# Altium PCB 2016-02-21_13-02-39.PcbDoc
Units mil, origin at the board's own origin, x right, y up, seen from the top; angles counter-clockwise.
Board outline 3075 x 1501 mil, 4 copper layers (Top Layer, MidLayer1, MidLayer2, Bottom Layer); 20 components, 10 nets, 49 pads, 143 vias.
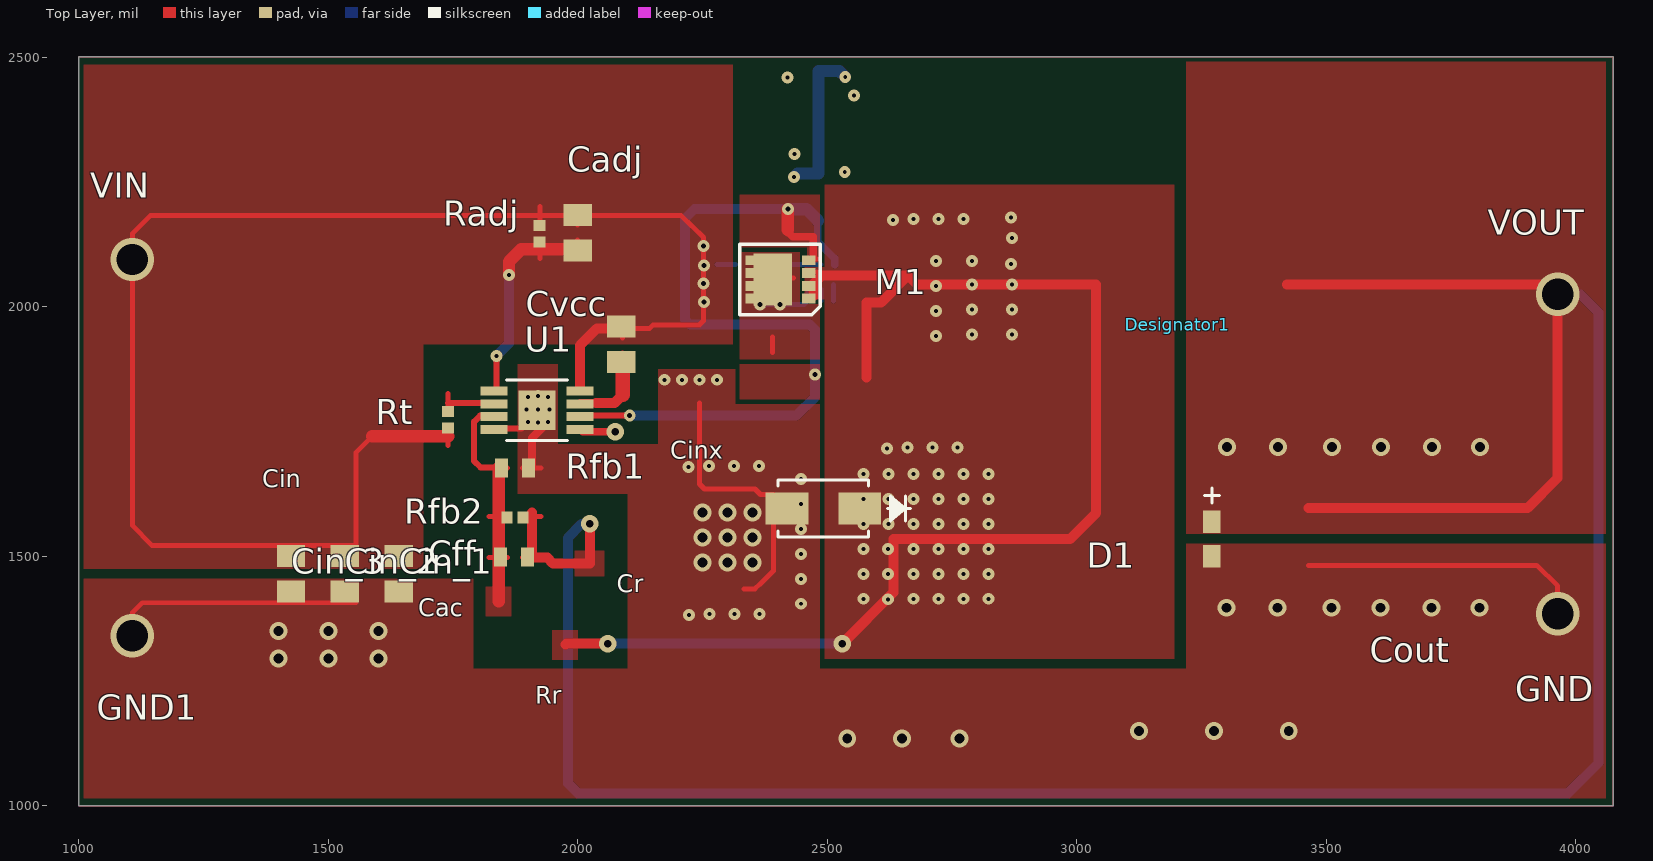
[diagram p0: Top Layer view]
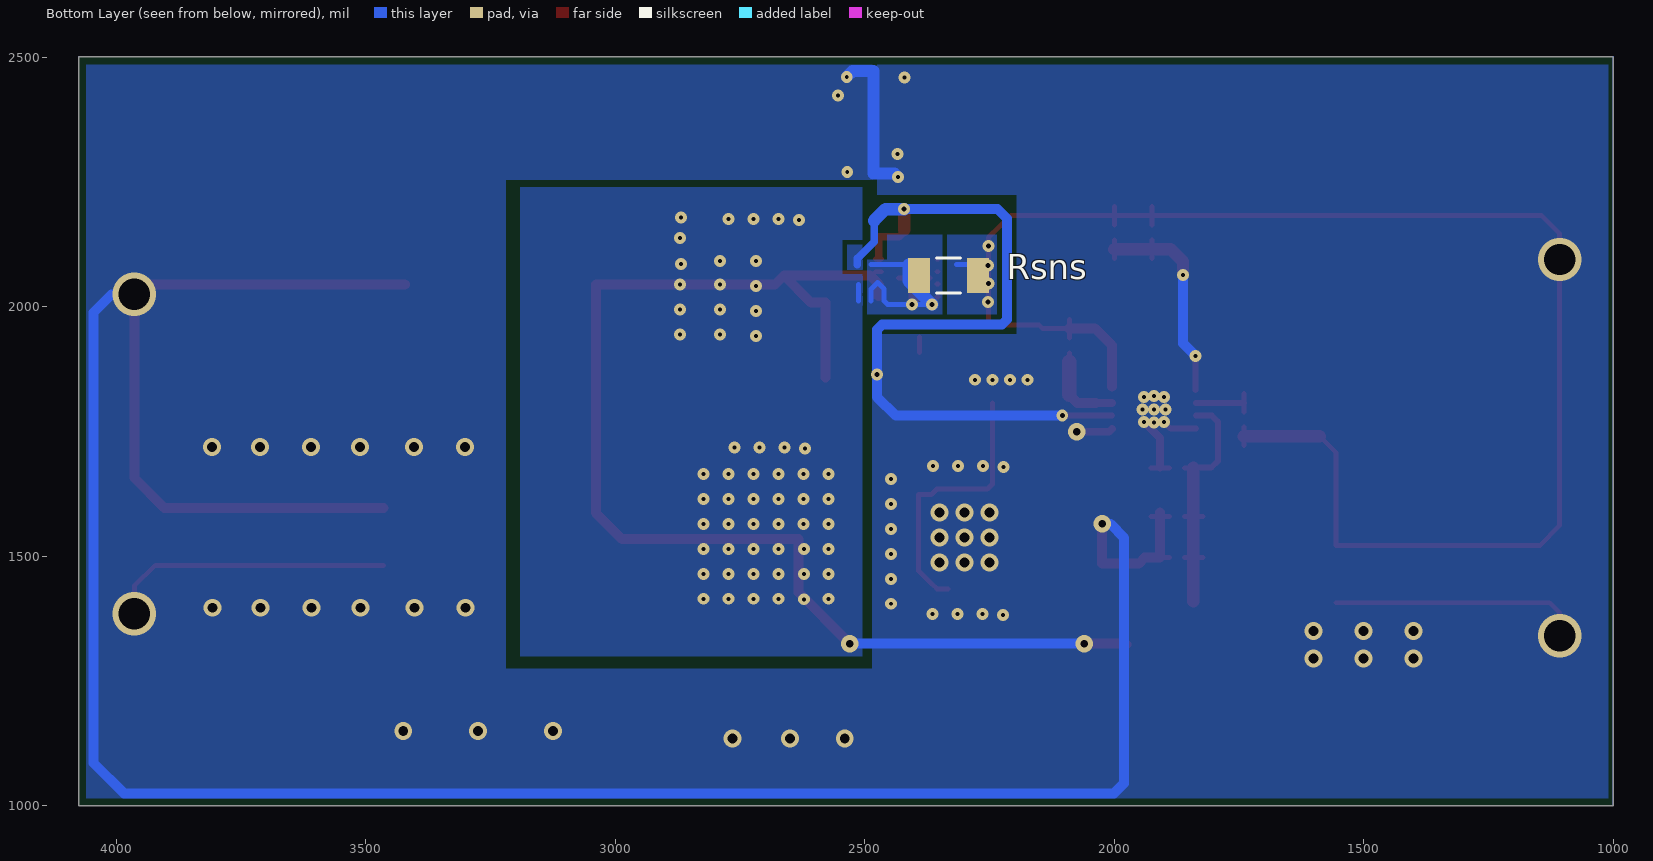
[diagram p1: Bottom Layer view, seen from below]
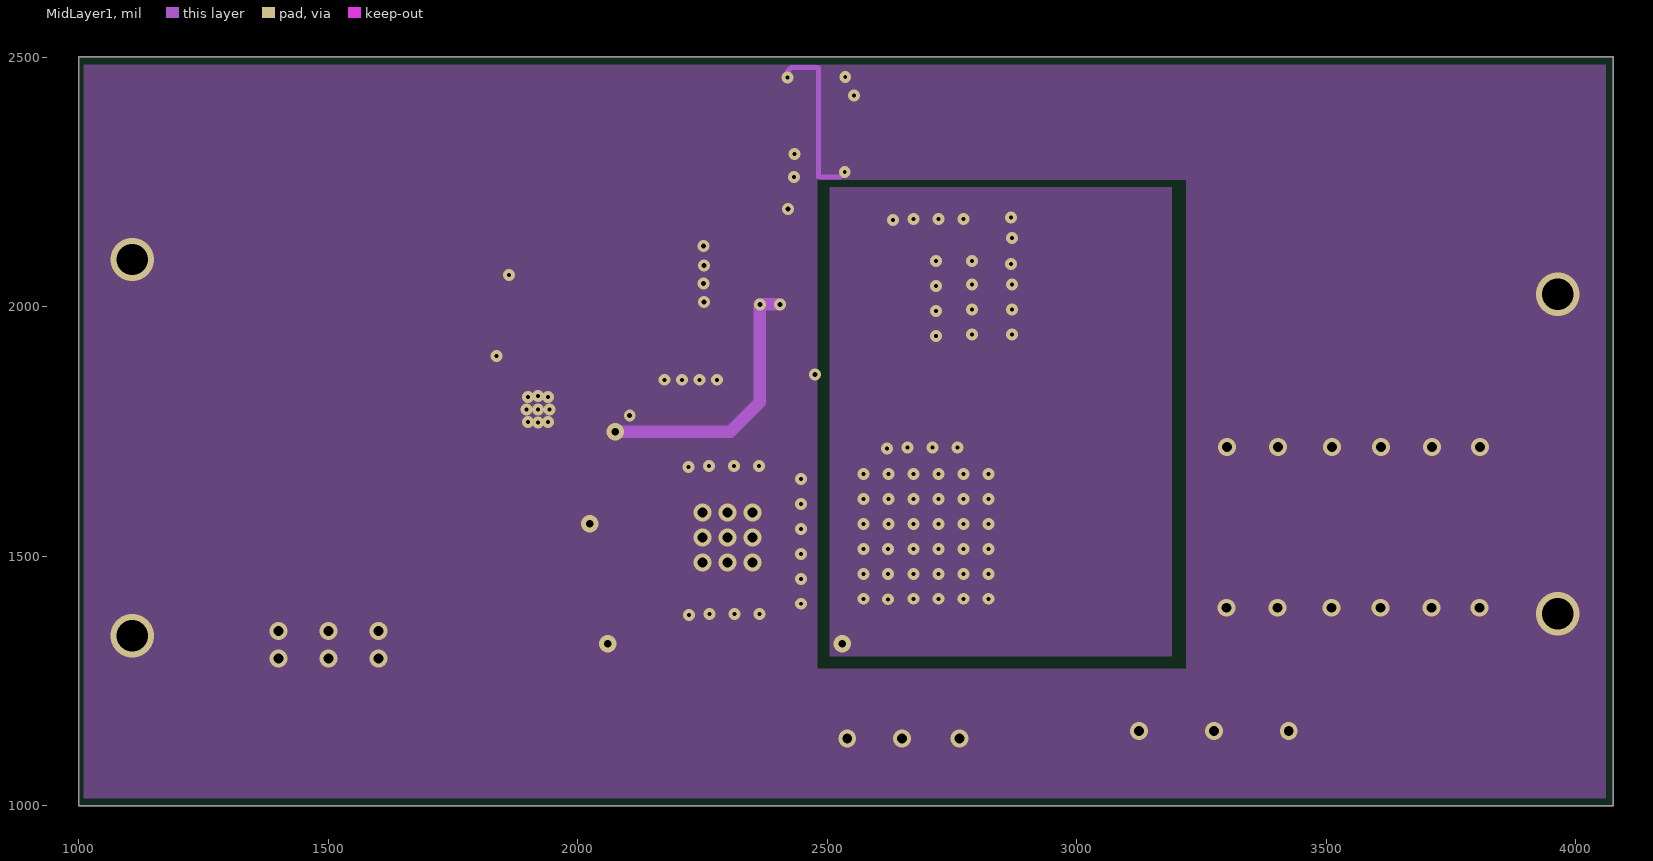
[diagram p2: MidLayer1]
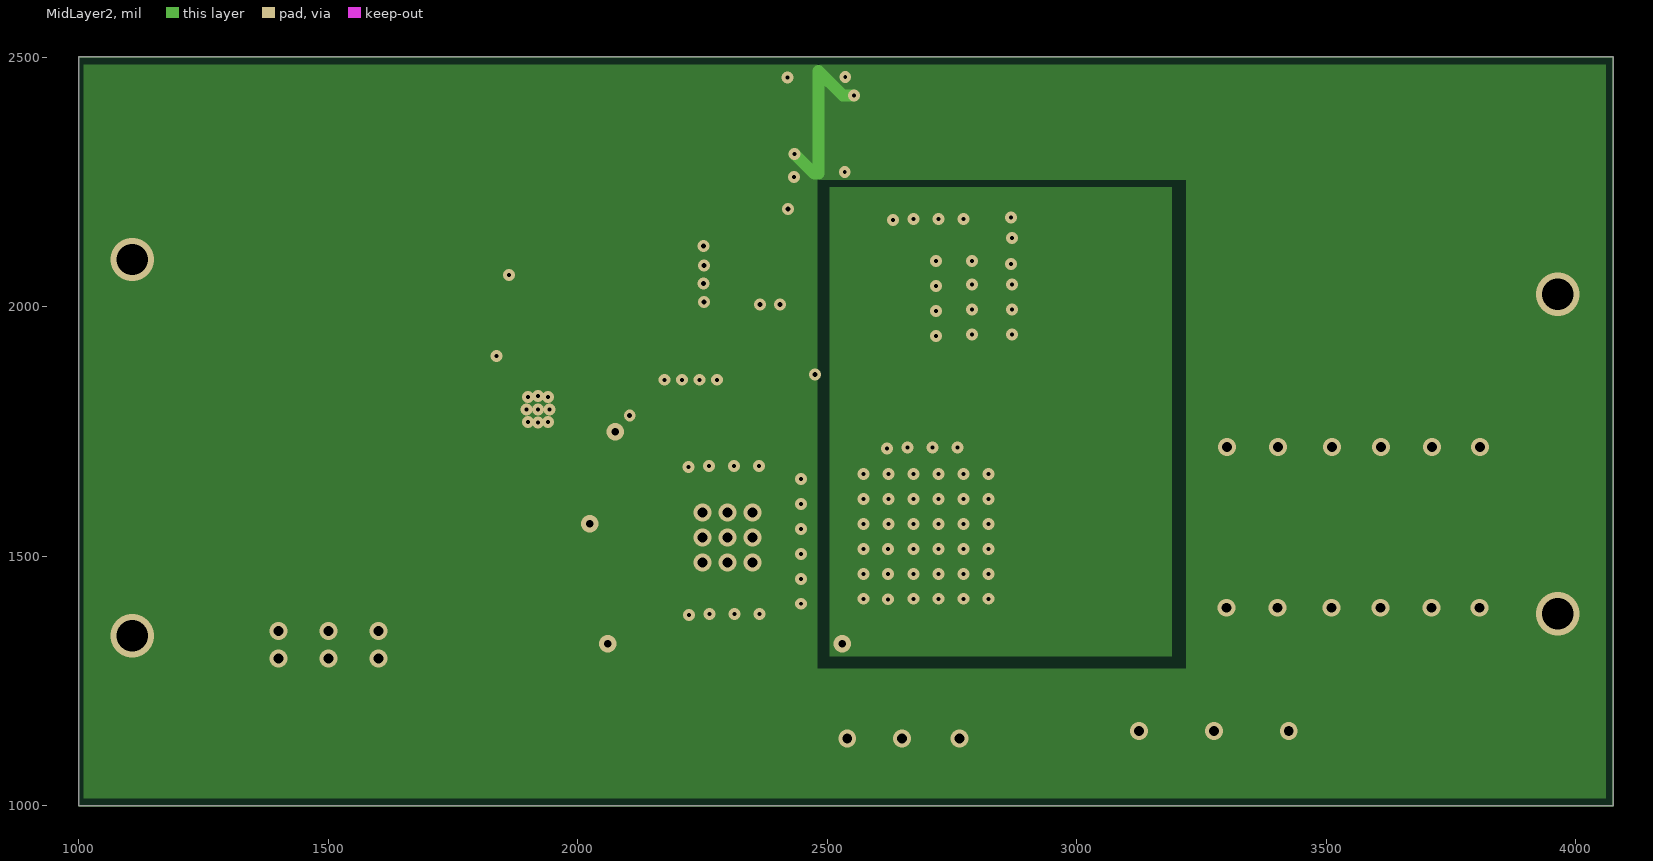
[diagram p3: MidLayer2]

## Layer stack, top to bottom
Top Solder: solder mask 0.4, Solder Resist, Dk 3.5
Top Layer: signal copper 1.4
Dielectric1: core 12.6, FR-4, Dk 4.8
MidLayer1: signal copper 1.4
Dielectric2: prepreg 12.6, FR-4, Dk 4.8
MidLayer2: signal copper 1.4
Dielectric3: core 12.6, FR-4, Dk 4.8
Bottom Layer: signal copper 1.4
Bottom Solder: solder mask 0.4, Solder Resist, Dk 3.5

## Board outline
1000,1000 4075,1000 4075,2501 1000,2501

## Design rules (kind name [scope] priority, off if disabled: settings)
Clearance [All] p1: gap=10
PlaneConnect [All] p1: planeconnectstyle=Direct reliefexpansion=20 reliefentries=4 reliefconductorwidth=10 reliefairgap=10
PolygonConnect [All] p1: connectstyle=Direct reliefconductorwidth=10 reliefentries=4 polygonreliefangle="90 Angle" airgapwidth=10
RoutingVias [All] p1: holewidth=28 width=50 viastyle="Through Hole" minholewidth=28 minwidth=50 maxholewidth=28 maxwidth=50
SolderMaskExpansion [All] p1: expansion=4
UnpouredPolygon [All] p1: allowunpoured=FALSE
Width [All] p1: maxlimit=10 minlimit=10 preferedwidth=10
28 further rules are at their usual default settings.

## Components (designator, comment, footprint, x,y, rotation, side; value= is the part's Value field where it differs from the comment)
Cadj "Comment" 0805 2000,2149 r270 top
Cff "Comment" 0603 1872,1499 r180 top
Cin_1 "Comment" 0805 1641,1465 r270 top
Cin_2 "Comment" 0805 1533,1465 r270 top
Cin_3 "Comment" 0805 1425,1465 r270 top
Cout "Comment" CAPSMT_6_S09 3271,1535 r270 top
Cvcc "Comment" 0805 2087,1925 r270 top
D1 "Comment" SMA 2492,1596 r180 top
Designator1 "Comment" WE-LHMI_1040 3203,1965 r0 top (schematic designator L1)
GND "Comment" TP-1502#1 3962,1383 r0 top
GND1 "Comment" TP-1502#2 1106,1340 r0 top
M1 "Comment" TRANS_NEXFET_Q3A 2399,2055 r180 top
Radj "Comment" 0402 1923,2147 r270 top
Rfb1 "Comment" 0603 1874,1677 r0 top
Rfb2 "Comment" 0402 1874,1578 r180 top
Rsns "Comment" 1206 2332,2063 r180 bottom
Rt "Comment" 0402 1740,1774 r90 top
U1 "Comment" MUY08A 1918,1793 r0 top
VIN "Comment" TP-1502#1 1106,2094 r0 top
VOUT "Comment" TP-1502#1 3962,2025 r0 top

## Footprints (in the part's own frame and the unit in brackets; to place one, negate y for a bottom-side part, rotate by r counter-clockwise, add the part's x,y. Pads: shape width x height; smd on the part's side, far side on the other; paste and mask are expansions set on the pad)
0402 [mil]
  rect 22x24 smd: 1(-16.5,0) 2(16.5,0)
0603 [mil]
  rect 26x38 smd: 1(-27.5,0) 2(27.5,0)
0805 [mil]
  rect 44x57 smd: 1(-35.5,0) 2(35.5,0)
1206 [mil]
  rect 44x71 smd: 1(59,0) 2(-59,0)
  silkscreen extent -24,-36 24,36
CAPSMT_6_S09 [mil]
  rect 45x35 smd: 1(-34.5,0) 2(34.5,0)
  silkscreen extent -102,-15 -72,15
MUY08A [mil]
  rect 54x18 smd: 1(-86.5,38.39) 2(-86.5,12.8) 3(-86.5,-12.8) 4(-86.5,-38.39) 5(86.5,-38.39) 6(86.5,-12.8) 7(86.5,12.8) 8(86.5,38.39)
  rect 74x79 smd: 9(0,0)
  silkscreen extent -61,-61 61,61
SMA [mil]
  rect 86x64 smd: 1(-73,0) 2(73,0)
  silkscreen extent -174,-58 90,58
TP-1502#1 [mil]
  round 60 hole 32: 1(0,0)
TP-1502#2 [mil]
  round 60 hole 32: 1(0,0) 1(0,0)
TRANS_NEXFET_Q3A [mm]
  rect 0.68x0.5 smd: 1(-1.625,0.975) 2(-1.625,0.325) 3(-1.625,-0.325) 4(-1.625,-0.975)
  rect 0.41x0.5 smd: 5(1.385,-0.975) 6(1.385,-0.325) 7(1.385,0.325) 8(1.385,0.975)
  rect 1.96x2.65 smd: 9(0.205,0)
  silkscreen extent -2.21,-1.8 1.9,1.8
WE-LHMI_1040 [mil]

## Via types
v1: diameter 24/24/24/24 (per signal layer), hole 8, Top Layer to Bottom Layer, 93 vias
v2: diameter 36/36/36/36 (per signal layer), hole 20, Top Layer to Bottom Layer, 33 vias
v3: diameter 24/24/24/24 (per signal layer), hole 10, Top Layer to Bottom Layer, 9 vias
v4: diameter 35/35/35/35 (per signal layer), hole 15, Top Layer to Bottom Layer, 4 vias
v5: diameter 87/87/87/87 (per signal layer), hole 63, Top Layer to Bottom Layer, 4 vias

## Nets (pads, with @x,y where several pads share a name; then routed paths per layer and width w, separated by ;. In a path a pad name is that pad's centre, name@x,y a point inside that pad or via, vN(x,y) a via of type N, cw(c..) or ccw(c..) an arc to the next point about the centre after c; other vN are vias at no path point)
0: Cin_1.2 Cin_2.2 Cin_3.2 Cout.2 D1.2 GND1.1 GND.1 Rfb1.2 U1.4 U1.9 | length 2864.1
  Top Layer w10: v5(1107,1341) 1107,1387 1127,1407 1555,1407 ; Rfb1.2@1889,1677.5 1926,1677.5 ; 2244,1807 2244,1645 2254,1635 2333,1635 2355,1635 2366,1624 2392,1624 2392,1471 2366,1445 2355,1435 2333,1435 ; 3465,1482 3922,1482 3964,1441 v5(3964,1385)
  Top Layer w12: U1.4@1836,1756 1887,1756 v1(1900,1769)
  Top Layer w16: Rfb1.2@1908,1678 1908,1737 v1(1940,1769)
  MidLayer1 w10: v1(2420,2460) 2420,2472 2428,2480 2482,2480 2482,2260 2525,2260 v1(2535,2270)
  MidLayer2 w24: v1(2434,2307) 2474,2267 2482,2267 2482,2473 2531,2424 v1(2554,2424)
  Bottom Layer w24: v1(2433,2260) 2440,2267 2482,2267 2482,2473 2524,2473 v1(2536,2461)
  other v1: 2223,1382 2264,1384 2314,1384 2364,1384 2447,1405 2447,1455 2447,1505 2447,1555 2447,1605 2447,1655 2222,1679 2263,1681 2313,1681 2363,1681 1920,1768 1897,1794 1920,1794 1943,1794 1900,1819 1940,1819 1920,1821 2174,1854 2209,1854 2244,1854 2279,1854
  other v2: 2540,1135 2650,1135 2765,1135 3125,1150 3275,1150 3425,1150 1400,1295 1500,1295 1600,1295 1400,1350 1500,1350 1600,1350 3300,1397 3402,1397 3511,1397 3609,1397 3711,1397 3807,1397 2250,1488 2300,1488 2350,1488 2250,1538 2300,1538 2350,1538 2250,1588 2300,1588 2350,1588
1: Cff.2 Rfb1.1 Rfb2.2 U1.3 | length 561.4
  Top Layer w10: 1822,1497.5 1859,1497.5 ; 1822,1579.5 Rfb2.2@1859,1579.5 ; 1822,1677.5 Rfb1.1@1859,1677.5
  Top Layer w12: U1.3@1836,1782 1804,1782 1792,1770 1792,1691 1805,1678 Rfb1.1@1841,1678
  Top Layer w25: 1841,1410 1841,1498 Rfb1.1@1841,1678
2: Cadj.1 Cin_1.1 Cin_2.1 Cin_3.1 Cvcc.1 Radj.1 Rsns.1 Rt.1 U1.8 VIN.1 | length 3315.7
  Top Layer w10: 1588,1741 1555,1708 1555,1522 1146,1522 1107,1562 v5(1107,2095) 1107,2147 1143,2183 1925,2183 2207,2183 2252,2139 2252,1972 2244,1964 2151,1964 2144,1957 Cvcc.1@2090,1957 ; 1739.5,1722 Rt.1@1739.5,1759 ; Radj.1@1924.5,2164 1924.5,2201 ; Cadj.1@1999.5,2164 Cadj.1@1999.5,2201 ; 2089.5,1938 Cvcc.1@2089.5,1975
  Top Layer w20: U1.8@2004,1840 2004,1923 2038,1957 Cvcc.1@2090,1957
  Top Layer w25: 1588,1741 1740,1741
  Bottom Layer w10: Rsns.1@2279,2085 2316,2085
  other v3: 2253,2010 2252,2047 2253,2083 2252,2122
3: Rt.2 U1.2 | length 134
  Top Layer w10: Rt.2@1739.5,1789 1739.5,1826 ; 1740,1807 1740,1808
  Top Layer w12: 1740,1807 U1.2@1836,1807
4: Cff.1 Cout.1 Rfb2.1 VOUT.1 | length 5454.8
  Top Layer w10: Cff.1@1889,1497.5 1926,1497.5 ; Rfb2.1@1889,1579.5 1926,1579.5
  Top Layer w20: 1908,1588 1908,1498 1939,1498 1950,1486 2024,1486 v4(2024,1565) ; 3421,2045 3944,2045 v5(3964,2025) 3964,1657 3904,1597 3465,1597
  Bottom Layer w20: v4(2024,1565) 2007,1565 1980,1537 1980,1045 2000,1025 3985,1025 4046,1086 4046,1989 4010,2025 v5(3964,2025)
  other v2: 3301,1719 3403,1719 3512,1719 3610,1719 3712,1719 3808,1719
6: M1.5 M1.6 M1.7 M1.8 M1.9 Rsns.2 U1.5 | length 1143.1
  Top Layer w10: M1.9@2353,2019.5 M1.9@2355,2019.5 ; M1.9@2353,2045.5 M1.9@2355,2045.5 ; M1.9@2353,2070.5 M1.9@2355,2070.5 ; M1.9@2353,2096.5 M1.9@2355,2096.5 ; M1.9@2369,2058 2432,2058 ; 2390,1909 2390,1940
  Top Layer w15: U1.5@2004,1756 2010,1750 v4(2075,1750)
  Top Layer w25: M1.9@2400,2019 M1.9@2400,2059
  MidLayer1 w25: v4(2075,1750) 2306,1750 2365,1809 v3(2365,2005) v3(2405,2005)
  Bottom Layer w10: v3(2365,2005) v3(2405,2005) 2454,2005 2461,2012 2461,2036 2474,2049 2487,2036 2487,2012 ; Rsns.2@2393,2085 2487,2085
  Bottom Layer w25: v3(2365,2005) 2412,2052 Rsns.2@2412,2085
7: Cadj.2 Radj.2 U1.1 | length 490.7
  Top Layer w10: 1924.5,2097 Radj.2@1924.5,2134 ; Cadj.2@1999.5,2097 Cadj.2@1999.5,2134
  Top Layer w12: U1.1@1837,1833 v1(1837,1902)
  Top Layer w25: v1(1862,2064) 1862,2091 1887,2116 1925,2116 Cadj.2@2000,2116
  Bottom Layer w20: v1(1837,1902) 1862,1927 v1(1862,2064)
8: Cvcc.2 U1.7 | length 196
  Top Layer w10: Cvcc.2@2089.5,1871 Cvcc.2@2089.5,1908
  Top Layer w16: U1.7@2004,1807 2036,1807
  Top Layer w20: 2036,1807 2073,1807 2090,1824
  Top Layer w30: 2090,1824 Cvcc.2@2090,1890
9: D1.1 M1.1 M1.2 M1.3 | length 2621.9
  Top Layer w10: M1.1@2466,2019.5 2478,2019.5 ; M1.2@2466,2045.5 2478,2045.5 ; M1.3@2466,2070.5 2478,2070.5
  Top Layer w20: 1975,1323 1977,1325 v4(2060,1325) ; M1.1@2472,2022 2472,2046 2489,2063 2662,2063 ; v4(2530,1325) 2633,1428 2633,1533 ; 2579,1859 2579,1909 2579,1959 2579,2009 2608,2009 2662,2063 ; 2633,1535 2735,1535 2987,1535 3039,1587 3039,2045 2680,2045 2662,2063
  Bottom Layer w10: 2512,2012 2512,2045
  Bottom Layer w20: v4(2060,1325) v4(2530,1325)
  other v1: 2622,1414 2573,1415 2673,1415 2723,1415 2773,1415 2823,1415 2573,1465 2622,1465 2673,1465 2723,1465 2773,1465 2823,1465 2573,1515 2622,1515 2673,1515 2723,1515 2773,1515 2823,1515 2573,1565 2623,1565 2673,1565 2723,1565 2773,1565 2823,1565 2573,1615 2623,1615 2673,1615 2723,1615 2773,1615 2823,1615 2573,1665 2623,1665 2673,1665 2723,1665 2773,1665 2823,1665 2620,1716 2661,1718 2711,1718 2761,1718 2718,1942 2790,1945 2870,1945 2718,1992 2790,1995 2870,1995 2718,2042 2790,2045 2870,2045 2868,2086 2718,2092 2790,2092 2870,2138 2632,2174 2673,2176 2723,2176 2773,2176 2868,2179
18: M1.4 U1.6 | length 1711.7
  Top Layer w10: M1.4@2466,2096.5 2478,2096.5
  Top Layer w12: U1.6@2004,1782 v3(2104,1782)
  Top Layer w15: v3(2421,2196) 2421,2149 2423,2149 2431,2141 2472,2141 M1.4@2472,2097
  Top Layer w25: 2421,2155 v3(2421,2196) 2421,2160
  Bottom Layer w15: 2481,2173 2481,2131 2514,2098 ; 2515,2085 2515,2098
  Bottom Layer w20: v3(2104,1782) 2437,1782 2475,1819 2475,1955 2465,1965 2225,1965 2215,1975 2215,2177 2234,2196 v3(2421,2196)
  Bottom Layer w25: v3(2421,2196) 2458,2196 2481,2173
  other v3: 2475,1865

## Polygon pours and split planes (outlines as drawn)
no net on Top Paste "Top Layer-No Net" (solid, remove dead copper, shelved): 2471.83,2023.31 2454.12,2023.31 2454.12,2009.92 2471.83,2009.92
no net on Top Paste "Top Layer-No Net" (solid, remove dead copper, shelved): 2471.83,2048.9 2454.12,2048.9 2454.12,2035.51 2471.83,2035.51
no net on Top Paste "Top Layer-No Net" (solid, remove dead copper, shelved): 2471.44,2074.49 2453.72,2074.49 2453.72,2061.1 2471.44,2061.1
no net on Top Paste "Top Layer-No Net" (solid, remove dead copper, shelved): 2471.83,2100.08 2454.12,2100.08 2454.12,2086.69 2471.83,2086.69
no net on Top Paste "Top Layer-No Net" (solid, remove dead copper, shelved): 2358.65,2100.08 2340.93,2100.08 2340.93,2086.69 2358.65,2086.69
no net on Top Paste "Top Layer-No Net" (solid, remove dead copper, shelved): 2358.65,2074.49 2340.93,2074.49 2340.93,2061.1 2358.65,2061.1
no net on Top Paste "Top Layer-No Net" (solid, remove dead copper, shelved): 2358.65,2048.9 2340.93,2048.9 2340.93,2035.51 2358.65,2035.51
no net on Top Paste "Top Layer-No Net" (solid, remove dead copper, shelved): 2358.65,2023.31 2340.93,2023.31 2340.93,2009.92 2358.65,2009.92
no net on Top Paste "Top Layer-No Net" (solid, remove dead copper, shelved): 2367.7,2050.08 2367.7,2009.92 2424.79,2009.92 2424.79,2050.08
no net on Top Paste "Top Layer-No Net" (solid, remove dead copper, shelved): 2367.7,2100.08 2367.7,2059.92 2424.79,2059.92 2424.79,2100.08
0 on Top Layer "Top Layer-No Net" (solid, pour order 23): 1010,1455 1790,1455 1790,1275 2100,1275 2100,1625 1880,1625 1880,1885 1960,1885 1960,1725 2161,1725 2161,1875 2315,1875 2315,1805 2485,1805 2485,1275 3220,1275 3220,1525 4060,1525 4060,1015 1010,1015
18 on Top Layer "Top Layer-No Net" (solid, pour order 16): 2325,1885 2325,1815 2485,1815 2485,1885
9 on Top Layer "Top Layer-No Net" (solid, pour order 15): 3195,2245 3195,1295 2495,1295 2495,2015 2455,2015 2455,2080 2495,2080 2495,2245
6 on Top Layer "Top Layer-No Net" (solid, pour order 14): 2325,2110 2445,2110 2445,2005 2485,2005 2485,1895 2325,1895
18 on Top Layer "Top Layer-No Net" (solid, pour order 13): 2325,2225 2325,2120 2460,2120 2460,2090 2485,2090 2485,2225
4 on Top Layer "Top Layer-No Net" (solid, pour order 12): 4060,2491 4060,1545 3220,1545 3220,2491
2 on Top Layer "Top Layer-No Net" (solid, pour order 11): 1010,2485 2310,2485 2310,1925 1690,1925 1690,1475 1010,1475
1 on Top Layer "Top Layer-No Net" (solid, pour order 7): 1815,1380 1815,1439 1866,1439 1866,1380
4 on Top Layer "Top Layer-No Net" (solid, pour order 5): 1994,1460 1994,1511 2053,1511 2053,1460
9 on Top Layer "Top Layer-No Net" (solid, pour order 3): 1949,1293 1949,1352 2000,1352 2000,1293
2 on Top Layer "Top Layer-No Net" (solid, pour order 1): 2177,1933 2177,1995 2310,1995 2310,1933
6 on Top Layer "Top Layer-No Net" (solid, pour order 0): 2363,1941 2363,2003 2483,2003 2483,1941
0 on Bottom Layer "Top Layer-No Net" (solid, pour order 24): 1010,2485 2475,2485 2475,2225 2195,2225 2195,1945 2485,1945 2485,1275 3220,1275 3220,2255 2485,2255 2485,2485 4060,2485 4060,1015 1010,1015
6 on Bottom Layer "Top Layer-No Net" (solid, pour order 20): 2495,1985 2495,2095 2455,2095 2455,2145 2345,2145 2345,1985
2 on Bottom Layer "Top Layer-No Net" (solid, pour order 19): 2235,1985 2335,1985 2335,2145 2235,2145
18 on Bottom Layer "Top Layer-No Net" (solid, pour order 18): 2505,2125 2535,2125 2535,2075 2505,2075
9 on Bottom Layer "Top Layer-No Net" (solid, pour order 17): 3190,2240 3190,1300 2505,1300 2505,2065 2545,2065 2545,2135 2505,2135 2505,2240
9 on Bottom Layer "Top Layer-No Net" (solid, pour order 10): 2504,2028 2504,2061 2519,2061 2519,2028
9 on Bottom Layer "Top Layer-No Net" (solid, pour order 9): 2504,2003 2504,2021 2519,2021 2519,2003
18 on Bottom Layer "Top Layer-No Net" (solid, pour order 8): 2504,2076 2504,2094 2519,2094 2519,2076
0 on MidLayer1 "Top Layer-No Net" (solid, pour order 25): 1010,2485 2480,2485 2480,1275 3220,1275 3220,2255 2485,2255 2485,2485 4060,2485 4060,1015 1010,1015
9 on MidLayer1 "Top Layer-No Net" (solid, pour order 21): 2505,1300 2505,2240 3190,2240 3190,1300
0 on MidLayer2 "Top Layer-No Net" (solid, pour order 26): 1010,2485 2480,2485 2480,1275 3220,1275 3220,2255 2485,2255 2485,2485 4060,2485 4060,1015 1010,1015
9 on MidLayer2 "Top Layer-No Net" (solid, pour order 22): 2505,1300 2505,2240 3190,2240 3190,1300

## Other copper
Multi-Layer:
  the board outline again, w1

## Silkscreen, mask and mechanical layers (free items; w line width, h text height)
Top Overlay:
  text "Cinx" at 2185,1696 h35
  text "Cin" at 1367,1639 h35
  text "Cr" at 2078,1428 h35
  text "Cac" at 1680,1380 h35
  text "Rr" at 1915,1205 h35